# Altium PCB MCD V1.00 R.00.PcbDoc (part 2 of 3)
Units mm, origin at the board's own origin, x right, y up, seen from the top; angles counter-clockwise.
Board outline 257.5 x 162.5 mm, 2 copper layers (Top Layer, Bottom Layer); 260 components, 165 nets, 831 pads, 233 vias.
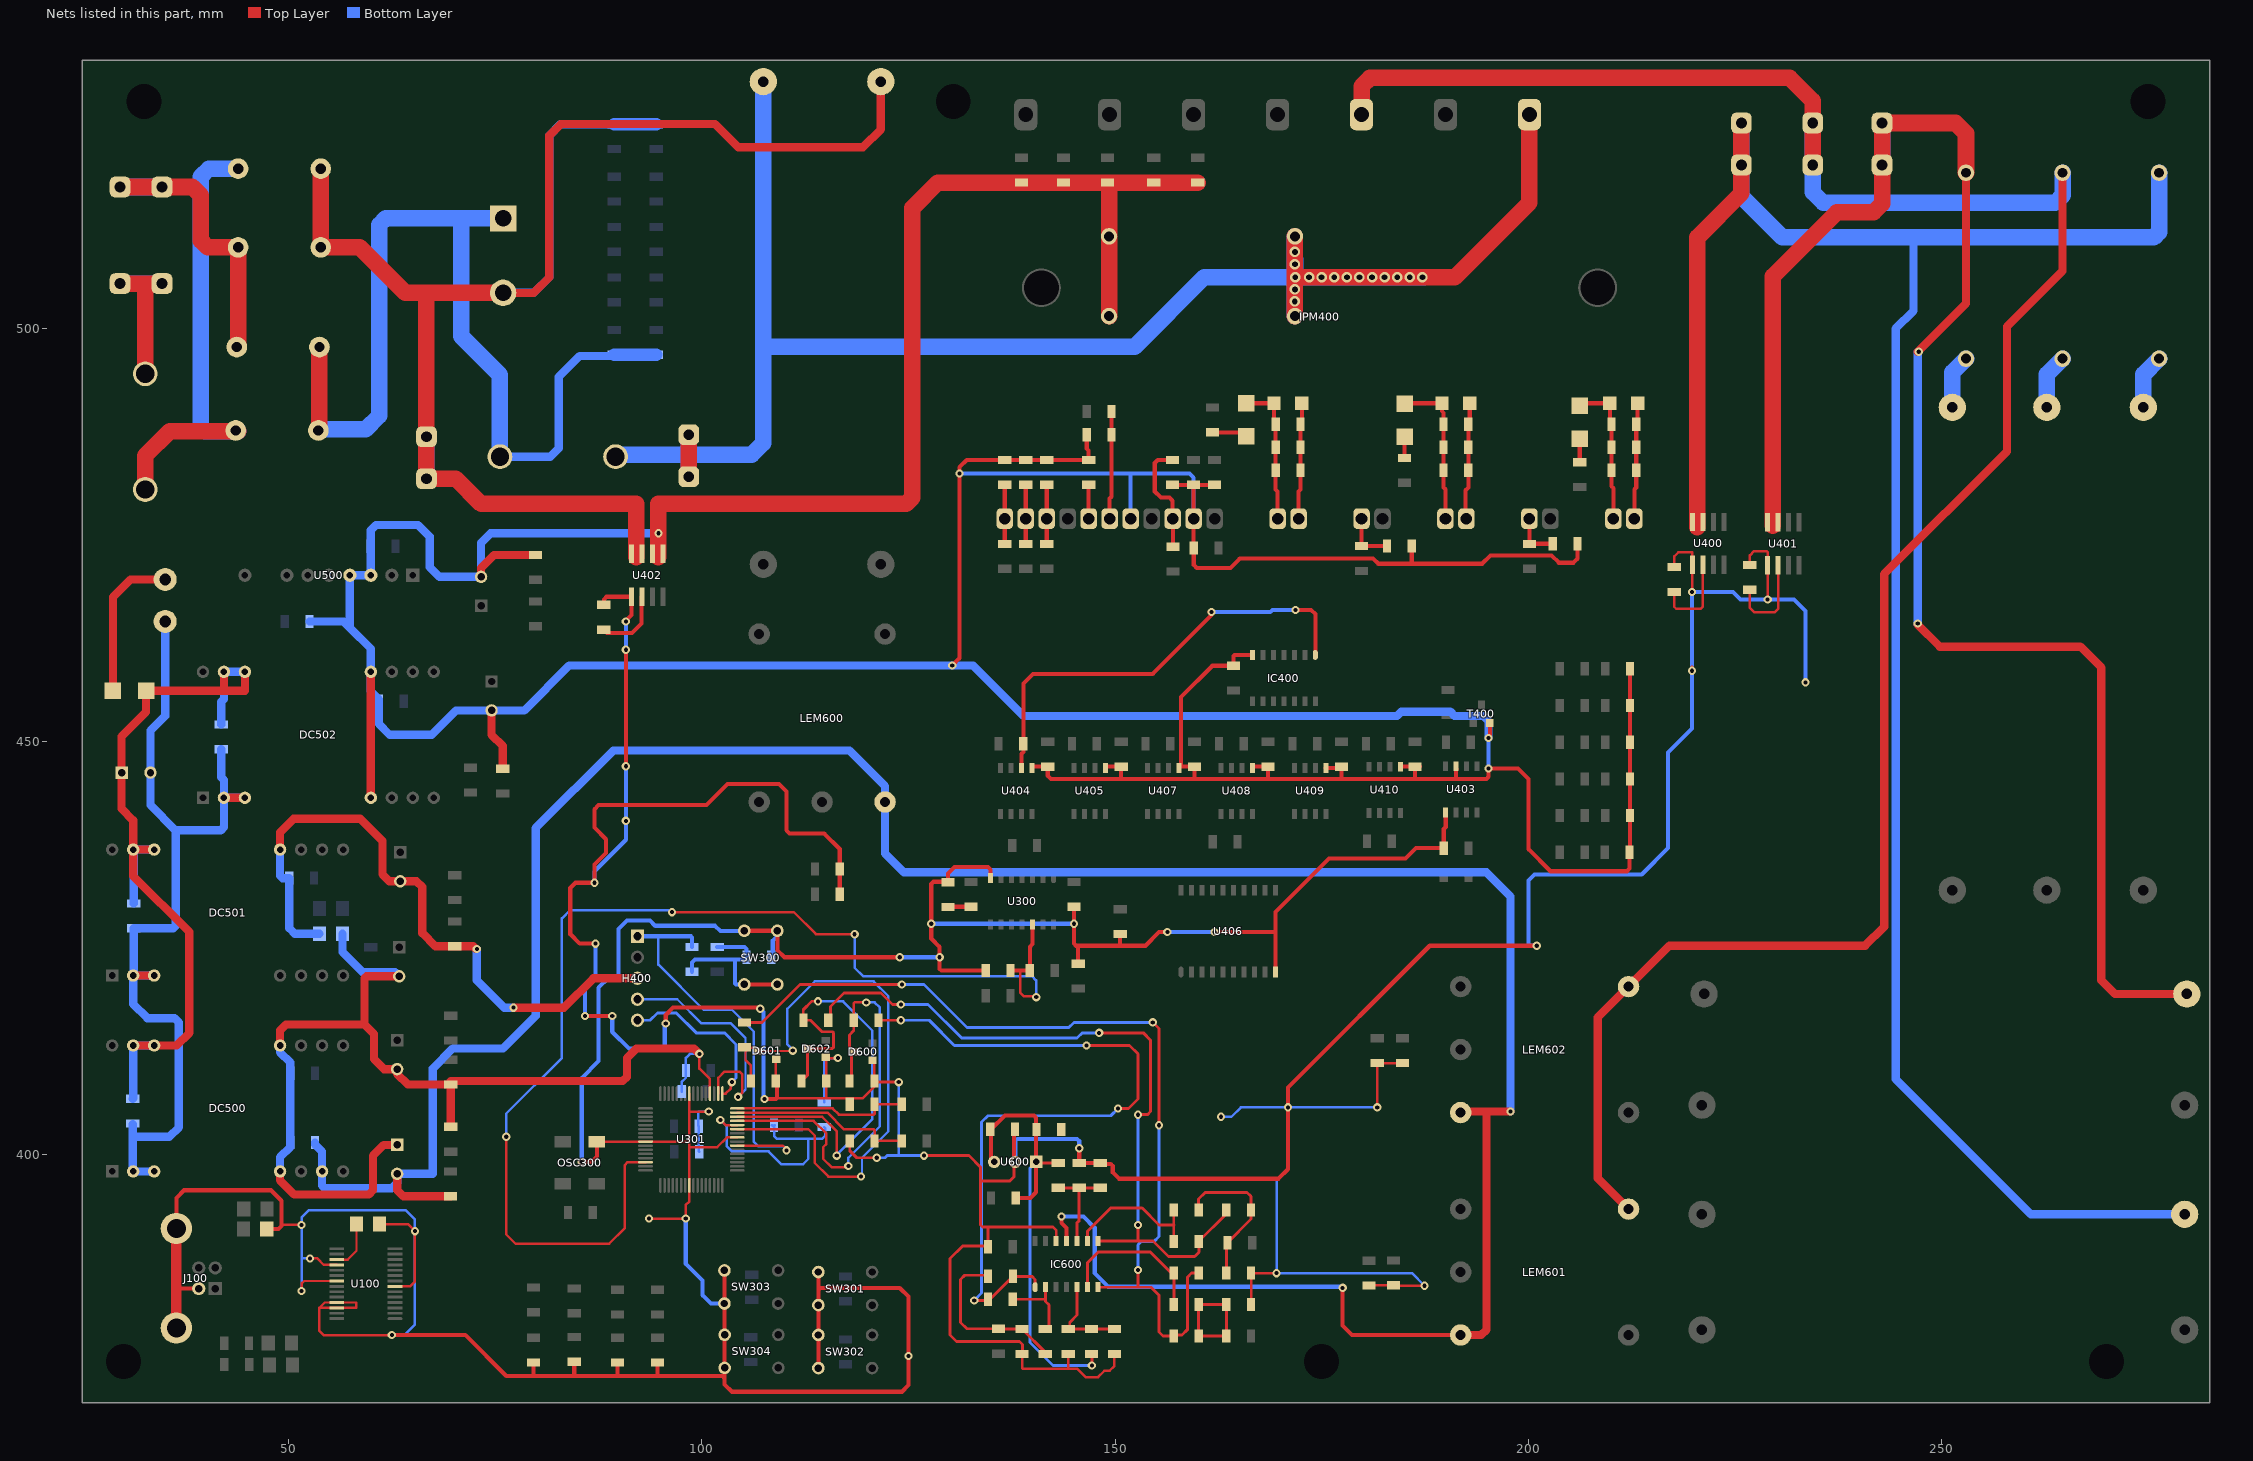
[diagram p2: the nets of this part, all layers, seen from the top]

## Via types
v1: diameter 1, hole 0.5, Top Layer to Bottom Layer, 192 vias
v2: diameter 1.2, hole 0.7, Top Layer to Bottom Layer, 26 vias
v3: diameter 1.27, hole 0.711, Top Layer to Bottom Layer, 15 vias

## Nets (pads, with @x,y where several pads share a name; then routed paths per layer and width w, separated by ;. In a path a pad name is that pad's centre, name@x,y a point inside that pad or via, vN(x,y) a via of type N, cw(c..) or ccw(c..) an arc to the next point about the centre after c; other vN are vias at no path point) (continued)
-15V_ANA: C504.2 C505.1 DC500.11 IC600.11 LEM600.5 LEM601.5 LEM602.5 R501.2 | length 339
  Top Layer w0.5: v1(143.51,392.557) 143.51,391.795 144.145,391.16 IC600.11@144.145,389.599 ; v1(177.546,383.921) 177.546,379.349 178.684,378.211 LEM601.5@191.257,378.211
  Top Layer w1: C504.2@63.124,397.718 63.124,395.775 63.905,394.994 R501.2@69.596,394.994 ; LEM601.5@191.257,378.211 194.315,378.211 194.945,378.841 194.945,405.257 ; LEM602.5@191.829,405.135 191.951,405.257 194.945,405.257 ; v1(197.866,405.257) 194.945,405.257
  Bottom Layer w0.5: v1(143.51,392.557) 146.177,392.557 147.542,391.192 147.542,385.731 149.225,384.048 177.419,384.048 v1(177.546,383.921)
  Bottom Layer w1: C505.1@53.194,401.5 53.194,401.27 54.039,400.425 DC500.11@54.039,398.01 54.039,396.295 54.348,395.986 62.484,395.986 63.124,396.626 C504.2@63.124,397.718 67.437,397.718 67.437,410.464 69.85,412.877 75.946,412.877 79.883,416.814 79.883,439.547 89.281,448.945 117.856,448.945 122.174,444.627 LEM600.5@122.174,442.722 122.174,436.499 124.46,434.213 194.945,434.213 197.866,431.292 v1(197.866,405.257)
GND_ANA: C304.1 C305.1 C400.1 C401.1 C412.1 C413.1 C420.1 C421.1 C500.2 C501.1 C504.1 C505.2 C506.2 C507.1 C601.1 C602.1 C603.1 C605.1 C606.1 C607.1 C609.1 C610.1 C611.1 C612.1 D600.1 D601.1 D602.1 DC500.9 DC500.16 IC600.12 L501.2 LED500.K LED501.A R607.2 R608.2 R615.2 R617.1 R624.2 R626.1 R627.2 R628.2 R629.2 U301.20 U400.5 U401.5 U402.5 U600.2 | length 701.3
  Top Layer w0.3: v1(99.695,412.242) 99.695,410.464 100.984,409.175 U301.20@100.984,407.428 ; C605.1@108.942,408.94 108.942,411.494 D601.1@109.017,411.569 ; 109.156,406.844 117.206,406.844 119.444,406.844 120.88,408.281 C601.1@120.88,408.94 120.88,411.25 D600.1@120.65,411.48 ; D602.1@114.986,411.823 115.075,411.734 v1(116.459,411.734) ; 115.062,406.908 C609.1@115.062,408.94 D602.1@115.062,411.747 ; C603.1@138.759,375.93 138.759,374.194 138.811,374.142 144.399,374.142 ; IC600.12@142.875,389.599 142.875,390.906 ; C607.1@144.347,375.93 144.347,374.194 144.399,374.142 ; R617.1@149.935,375.93 149.935,374.471 149.352,373.888 148.717,373.888 147.955,373.126 146.431,373.126 145.415,374.142 144.399,374.142 ; C606.1@166.469,381.902 C610.1@166.469,385.712 169.532,385.712 v1(169.545,385.699) ; R628.2@180.721,384.199 180.75,384.228 R615.2@183.701,384.228 183.754,384.175 v1(187.452,384.175) ; v1(181.737,405.765) R629.2@181.737,411.123 183.261,411.123 R624.2@184.785,411.123 ; C400.1@217.678,471.146 217.678,472.44 218.186,472.948 219.837,472.948 219.882,472.903 U400.5@219.882,471.421 219.882,468.167 v1(219.837,468.122) ; C412.1@226.822,471.4 226.822,472.567 227.33,473.075 228.854,473.075 228.981,472.948 U401.5@228.981,471.364 v1(228.981,467.233)
  Top Layer w0.35: C413.1@117.904,401.701 117.904,400.51 118.745,399.669 v1(121.158,399.669) ; C601.1@120.88,408.94 121.007,408.813 v1(123.825,408.813) ; v1(126.873,399.923) 132.334,399.923 133.731,398.526 133.731,397.002 ; 133.731,397.383 133.731,397.002 ; 135.001,391.287 134.747,391.287 ; U600.2@137.92,399.161 137.795,399.036 137.795,397.383 137.287,396.875 133.858,396.875 133.731,397.002 ; C603.1@138.759,375.93 138.811,375.982 138.811,377.063 138.43,377.444 130.81,377.444 130.048,378.206 130.048,387.477 131.572,389.001 134.526,389.001 R608.2@134.64,388.887 134.64,391.18 134.747,391.287 ; 142.875,390.906 142.494,391.287 134.747,391.287 ; 133.731,397.002 133.731,391.541 133.985,391.287 134.747,391.287
  Top Layer w0.5: v1(85.852,416.814) v1(89.154,416.814) ; v1(87.122,425.577) 85.217,425.577 84.074,426.72 84.074,432.308 84.709,432.943 v1(86.995,432.943) 86.995,435.166 88.392,436.562 88.392,438.214 86.995,439.611 86.995,441.833 87.503,442.341 100.584,442.341 103.124,444.881 109.347,444.881 110.236,443.992 110.236,439.293 110.617,438.912 114.808,438.912 116.689,437.031 R607.2@116.689,434.594 R627.2@116.689,431.546 ; C420.1@88.138,466.574 88.138,467.233 88.464,467.559 U402.5@91.472,467.559 91.472,465.36 90.805,464.693 v1(90.805,464.566) ; v1(90.805,447.04) v1(90.805,461.137) ; v1(95.631,415.925) 95.631,416.941 96.52,417.83 106.934,417.83 v1(107.061,417.703) ; v1(107.569,406.781) 108.966,406.781 109.093,406.908 109.093,408.789 C605.1@108.942,408.94 ; U600.2@137.794,399.287 C602.1@137.794,403.111 ; v1(145.669,400.812) 145.665,400.808 C611.1@145.665,399.023 R626.1@148.205,399.023 148.321,398.907 149.479,398.907 149.733,398.653 149.733,397.891 150.495,397.129 169.799,397.129 170.942,398.272 v1(170.942,405.765) 170.942,408.178 188.087,425.323 v1(201.041,425.323) ; v1(219.837,458.597) v1@219.837,458.978
  Top Layer w1: DC500.9@48.959,398.01 48.959,396.93 50.665,395.224 59.69,395.224 60.198,395.732 60.198,399.923 61.493,401.218 C504.1@63.124,401.218 ; DC500.16@48.959,413.25 48.959,415.092 49.665,415.798 59.182,415.798 ; C506.2@63.378,421.622 59.407,421.622 59.182,421.397 59.182,415.798 ; LED501.A@69.617,403.405 69.617,408.94 90.424,408.94 90.932,409.448 90.932,411.734 92.075,412.877 99.06,412.877 v1(99.695,412.242) ; LED500.K@69.617,408.533 64.415,408.533 63.124,409.824 C500.2@63.124,410.39 61.542,410.39 60.325,411.607 60.325,414.655 59.182,415.798
  Bottom Layer w0.3: C305.1@97.56,407.67 97.56,408.837 98.068,409.345 C304.1@98.068,410.21 98.068,411.758 98.552,412.242 v1(99.695,412.242) ; C421.1@114.808,406.376 114.808,411.353 115.189,411.734 v1(116.459,411.734) ; v1(162.814,404.622) 164.084,404.622 165.227,405.765 v1(170.942,405.765) ; v1(181.737,405.765) v1(170.942,405.765) ; v1(187.452,384.175) 185.928,385.699 v1(169.545,385.699) 169.545,396.875 170.942,398.272 v1(170.942,405.765)
  Bottom Layer w0.35: v1(121.158,399.669) 122.174,399.669 122.428,399.923 123.825,399.923 ; v1(123.825,408.813) 123.825,399.923 ; v1(126.873,399.923) 123.825,399.923
  Bottom Layer w0.5: v1(85.852,416.814) 85.852,420.37 87.122,421.64 v1(87.122,425.577) ; v1(86.995,432.943) 86.995,434.34 90.805,438.15 v1(90.805,447.04) ; v1(89.154,416.814) 89.154,414.909 91.186,412.877 95.504,412.877 ; v1(90.805,461.137) v1(90.805,464.566) ; v1(95.631,415.925) 95.504,415.798 95.504,412.877 ; v1(99.695,412.242) 99.06,412.877 95.504,412.877 ; v1(107.061,417.703) 107.442,417.322 107.442,406.781 107.569,406.654 v1(107.569,406.781) ; U600.2@137.92,399.161 137.92,401.699 138.176,401.955 145.415,401.955 145.669,401.701 v1(145.669,400.812) ; v1(201.041,425.323) 200.152,425.323 200.025,425.45 200.025,433.197 200.787,433.959 213.741,433.959 216.916,437.134 216.916,448.691 219.837,451.612 v1(219.837,468.122) 224.79,468.122 225.679,467.233 v1(228.981,467.233) 232.156,467.233 233.553,465.836 v1(233.553,457.2)
  Bottom Layer w1: DC500.9@48.959,398.01 48.959,399.733 50.194,400.968 C505.2@50.194,401.5 C501.1@50.194,409.882 50.194,411.197 48.959,412.432 DC500.16@48.959,413.25 ; L501.2@56.523,426.773 56.523,424.553 58.951,422.125 C507.1@59.925,422.125 62.875,422.125 C506.2@63.378,421.622
  other v1: 90.805,440.436
GND_DIG: C100.1 C300.1 C301.1 C302.1 C303.1 C306.1 C419.1 C439.1 C509.2 C511.1 DC501.16 FLT_LED.K H400.3 J100.4 J100.5 J100.6 L501.1 LED502.K OSC300.2 R103.1 R305.2 SW300.1 SW301.1 SW302.1 SW303.1 SW304.1 U100.7 U100.18 U100.21 U100.25 U100.26 U300.7 U301.9 U301.25 U301.41 U301.56 U403.5 U406.10 UL_300.K UL_301.K UL_302.K UL_303.K | length 576.7
  Top Layer w0.3: 49.149,391.414 49.276,391.541 v1(51.562,391.541) v1@51.308,391.795 ; v1(51.562,383.54) 51.562,384.429 51.882,384.749 U100.21@55.819,384.749 ; v1(52.578,387.477) 53.467,387.477 54.229,386.715 55.803,386.715 U100.18@55.819,386.699 ; 58.166,382.143 58.16,382.149 ; C100.1@61.006,391.637 64.42,391.637 v1(65.278,390.779) 65.278,384.683 64.694,384.099 U100.7@62.869,384.099 ; v1(62.484,378.206) 54.229,378.206 53.721,378.714 53.721,381.508 ; OSC300.2@87.684,401.628 U301.41@93.184,401.628 98.431,401.628 98.484,401.574 ; v1(93.599,392.303) v1(98.044,392.303) 98.044,393.954 98.484,394.394 U301.56@98.484,396.328 98.484,400.939 ; U301.25@98.484,407.428 98.484,405.257 ; v1(100.838,405.257) 98.484,405.257 ; U301.9@104.284,402.128 103.043,402.128 101.854,400.939 98.484,400.939 ; 53.721,381.508 54.362,382.149 U100.25@55.819,382.149 58.16,382.149 ; 53.721,381.508 55.81,381.508 U100.26@55.819,381.499 58.157,381.499 58.166,381.508 58.16,381.514 58.16,382.149 ; 98.484,400.939 98.484,401.574 ; 98.484,401.574 98.484,405.257
  Top Layer w0.5: 36.406,383.921 36.493,383.834 J100.4@39.116,383.834 ; J100.6@36.406,391.104 36.406,394.8 37.338,395.732 47.879,395.732 49.149,394.462 49.149,391.414 48.775,391.04 R103.1@47.339,391.04 ; v1(62.484,378.206) 71.374,378.206 76.327,373.253 79.502,373.253 ; UL_303.K@79.638,374.888 79.638,373.389 79.502,373.253 ; 84.559,373.357 UL_302.K@84.559,374.967 ; v1(85.471,399.161) 86.614,399.161 87.294,399.841 OSC300.2@87.294,401.607 ; UL_301.K@89.798,374.888 89.798,373.262 89.789,373.253 ; UL_300.K@94.624,374.888 94.624,373.389 94.488,373.253 ; SW303.1@102.73,386.026 SW303.1@102.73,382.026 102.73,378.272 SW304.1@102.762,378.24 SW304.1@102.762,374.24 102.762,372.98 ; SW300.1@105.135,427.136 SW300.1@109.135,427.136 109.135,424.773 109.982,423.926 v1(123.952,423.926) ; SW302.1@114.097,374.216 SW302.1@114.097,378.216 SW301.1@114.097,381.836 114.097,383.667 ; SW301.1@114.097,385.836 114.097,383.667 ; v1(125,375.666) v1@125,376.047 ; C301.1@134.36,422.313 128.994,422.313 128.778,422.529 v1(128.778,423.926) 128.778,425.196 127.762,426.212 v1(127.762,427.99) 127.762,432.816 128.016,433.07 129.746,433.07 FLT_LED.K@129.794,433.022 129.794,434.086 130.556,434.848 134.62,434.848 134.944,434.524 U300.7@134.944,433.5 ; R305.2@145.034,430.046 v1(145.034,427.99) 145.034,425.577 145.288,425.323 150.622,425.323 ; C306.1@145.542,423.14 145.542,425.323 ; C439.1@150.622,426.744 150.622,425.323 ; v1(156.337,426.974) 155.321,426.974 153.67,425.323 150.622,425.323 ; v1(162.052,426.974) 169.418,426.974 ; U406.10@169.418,422.148 169.418,426.974 ; U403.5@190.028,441.127 190.028,439.71 189.786,439.468 C419.1@189.786,437.134 186.436,437.134 185.166,435.864 175.895,435.864 169.418,429.387 169.418,426.974 ; 79.502,373.253 84.455,373.253 89.789,373.253 ; 89.789,373.253 94.488,373.253 ; 94.488,373.253 102.489,373.253 102.762,372.98 ; 102.762,372.98 102.762,372.218 103.632,371.348 124.206,371.348 125,372.142 v1@125,376.047 ; 114.097,383.667 114.351,383.921 123.952,383.921 125,382.873 v1@125,376.047
  Top Layer w1: DC501.16@48.959,436.96 48.959,439.056 50.593,440.69 58.674,440.69 61.341,438.023 61.341,433.959 62.174,433.126 C509.2@63.5,433.126 65.476,433.126 66.167,432.435 66.167,426.847 67.765,425.249 LED502.K@70.109,425.249 72.337,425.249 72.644,424.942 v1(72.771,424.942) ; v1(77.216,417.83) 83.312,417.83 86.868,421.386 H400.3@92.202,421.386
  Top Layer w1.25: J100.5@36.406,379.064 36.406,383.921 J100.6@36.406,391.104
  Bottom Layer w0.3: v1(51.562,383.54) 51.562,387.604 ; v1(52.578,387.477) 51.689,387.477 51.562,387.604 ; v1(62.484,378.206) 64.008,378.206 65.278,379.476 v1(65.278,390.779) 65.278,392.176 64.135,393.319 52.451,393.319 51.562,392.43 v1(51.562,391.541) 51.562,387.604 ; C303.1@99.671,400.399 99.625,400.445 C302.1@99.625,403.485 99.568,403.542 99.568,405.257 v1(100.838,405.257)
  Bottom Layer w0.5: v1(85.471,399.161) 85.471,409.321 87.503,411.353 87.503,420.243 88.646,421.386 89.916,421.386 ; H400.3@92.202,421.386 89.916,421.386 ; v1(98.044,392.303) 98.044,386.842 100.076,384.81 100.076,383.032 101.092,382.016 101.102,382.026 SW303.1@102.73,382.026 ; SW300.1@105.135,427.136 105.1,427.101 102.235,427.101 101.6,427.736 94.361,427.736 93.726,428.371 90.932,428.371 89.916,427.355 89.916,421.386 ; C300.1@108.413,423.938 108.585,424.11 108.585,425.958 109.135,426.508 SW300.1@109.135,427.136 ; v1(123.952,423.926) v1(128.778,423.926) ; v1(127.762,427.99) v1(145.034,427.99) ; v1(156.337,426.974) v1(162.052,426.974)
  Bottom Layer w1: DC501.16@48.959,436.96 48.959,433.805 49.26,433.504 C511.1@50.067,433.504 50.067,427.453 50.747,426.773 L501.1@53.723,426.773 ; v1(72.771,424.942) 72.771,421.132 76.073,417.83 v1(77.216,417.83)
GND_DRV: C408.1 C414.1 C415.1 C416.1 C417.1 C418.1 C422.1 C423.1 C424.1 C425.1 C426.1 C427.1 C428.1 C429.1 C430.1 C431.1 C432.1 C433.1 C434.1 C438.1 C513.2 C515.1 C516.1 C517.2 C518.1 DC502.9 DC502.16 IC400.7 IPM400.12 IPM400.15 LED503.K LED504.K PWM_UN.K PWM_UP.K PWM_VN.K PWM_VP.K PWM_WN.K PWM_WP.K R406.1 R407.1 R408.1 R409.1 R410.1 T400.2 U402.1 U402.2 U403.3 U404.5 U405.5 U407.5 U408.5 U409.5 U410.5 U500.3 U500.4 | length 679.6
  Top Layer w0.5: v1(130.302,459.232) 131.191,460.121 131.191,483.235 132.056,484.1 C433.1@136.652,484.1 ; C433.1@136.628,484.124 C433.1@136.652,484.1 ; U404.5@139.95,446.853 140.095,446.998 C422.1@141.855,446.998 141.855,445.901 142.24,445.516 150.749,445.516 150.745,445.52 ; C415.1@146.582,487.172 146.582,485.497 146.812,485.267 C414.1@146.812,484.1 C425.1@141.732,484.1 C429.1@139.192,484.1 C433.1@136.652,484.1 ; U405.5@148.84,446.853 148.985,446.998 C424.1@150.745,446.998 150.745,445.52 ; C431.1@156.972,481.1 C418.1@159.512,481.1 ; C416.1@162.052,481.1 C418.1@159.512,481.1 ; U408.5@166.62,446.853 166.765,446.998 C428.1@168.525,446.998 168.525,445.523 168.529,445.52 ; IC400.7@166.624,460.514 164.477,460.514 164.338,460.375 C438.1@164.338,459.208 161.774,459.208 157.988,455.422 157.988,447.111 U407.5@157.73,446.853 157.875,446.998 C426.1@159.635,446.998 159.635,445.643 159.512,445.52 ; U409.5@175.51,446.853 177.27,446.853 C430.1@177.415,446.998 177.415,445.523 177.419,445.52 ; U410.5@184.527,446.98 184.545,446.998 C432.1@186.305,446.998 ; 185.904,471.829 C427.1@185.904,473.71 ; C432.1@186.902,446.998 C432.1@186.305,446.998 ; U403.3@191.298,446.727 191.262,446.691 191.262,445.643 191.139,445.52 ; v1(195.199,450.469) 195.367,450.637 T400.2@195.367,452.269 ; C423.1@205.97,473.964 205.97,472.162 205.486,471.678 203.708,471.678 202.819,472.567 195.453,472.567 194.437,471.551 181.864,471.551 181.229,472.186 165.1,472.186 163.957,471.043 159.893,471.043 159.536,471.4 C417.1@159.536,473.456 159.512,473.48 IPM400.12@159.512,477.012 C418.1@159.512,481.1 ; PWM_UP.K@212.32,458.851 PWM_UN.K@212.32,454.406 PWM_VP.K@212.32,449.961 PWM_VN.K@212.32,445.516 PWM_WP.K@212.32,441.071 212.32,436.674 PWM_WN.K@212.272,436.626 212.272,434.649 211.963,434.34 202.692,434.34 200.025,437.007 200.025,445.516 198.755,446.786 v1(195.199,446.786) 195.199,445.77 194.949,445.52 191.139,445.52 ; 150.745,445.52 159.512,445.52 ; 159.512,445.52 168.529,445.52 ; 168.529,445.52 177.419,445.52 ; 177.419,445.52 186.309,445.52 ; C432.1@186.305,446.998 186.305,445.523 186.309,445.52 ; 186.309,445.52 191.139,445.52
  Top Layer w1: DC502.9@59.944,443.23 59.944,451.739 DC502.16@59.944,458.47 ; C517.2@73.279,469.971 73.279,471.043 74.851,472.615 LED504.K@79.883,472.615 ; C513.2@74.549,453.799 74.549,450.85 75.914,449.485 LED503.K@75.914,446.738
  Top Layer w2: 94.742,472.313 94.742,478.79 124.714,478.79 125.476,479.552 125.476,514.604 128.548,517.676 R410.1@138.684,517.676 R406.1@143.764,517.676 R407.1@149.098,517.676 ; C408.1@149.278,501.523 C434.1@149.278,511.175 149.278,517.496 R407.1@149.098,517.676 ; R409.1@160.02,517.676 R408.1@154.686,517.676 R407.1@149.098,517.676
  Bottom Layer w0.5: v1(131.191,482.473) 151.892,482.473 ; IPM400.15@151.892,477.012 151.892,482.473 ; IPM400.12@159.512,477.012 159.512,481.965 159.004,482.473 151.892,482.473 ; v1(195.199,446.786) v1(195.199,450.469)
  Bottom Layer w1: C516.1@52.511,464.551 56.657,464.551 57.404,463.804 ; v1(94.742,475.234) 74.422,475.234 73.279,474.091 C517.2@73.279,469.971 68.255,469.971 67.056,471.17 67.056,474.853 65.659,476.25 60.579,476.25 59.925,475.596 C518.1@59.925,473.656 59.944,473.637 U500.3@59.944,470.154 U500.4@57.404,470.154 57.404,463.804 ; v1(195.199,450.469) 195.199,452.501 194.564,453.136 191.087,453.136 190.579,453.644 184.642,453.644 184.134,453.136 180.657,453.136 152.844,453.136 138.938,453.136 132.842,459.232 83.947,459.232 78.514,453.799 C513.2@74.549,453.799 70.259,453.799 67.31,450.85 62.23,450.85 60.921,452.159 C515.1@60.921,454.906 60.921,455.136 59.944,456.113 DC502.16@59.944,458.47 59.944,461.264 57.404,463.804
NetC100_2: C100.2 U100.17 | length 5.8
  Top Layer w0.3: U100.17@56.05,387.35 57.15,387.35 58.206,388.406 C100.2@58.206,391.637
NetC300_2: C300.2 R300.2 R302.1 SW300.2 | length 20.7
  Top Layer w0.5: SW300.2@105.135,420.636 SW300.2@109.135,420.636
  Bottom Layer w0.5: R302.1@98.806,422.172 98.806,423.291 99.187,423.672 104.013,423.672 ; R300.2@101.854,425.172 105.18,425.172 105.413,424.939 C300.2@105.413,423.938 105.147,423.672 104.013,423.672 ; SW300.2@105.135,420.636 104.128,420.636 104.013,420.751 104.013,423.672
NetC301_2: C301.2 R304.2 U300.12 U301.46 | length 145.6
  Top Layer w0.3: v1(76.327,402.209) 76.327,390.398 77.47,389.255 88.773,389.255 90.678,391.16 90.678,398.78 91.026,399.128 U301.46@93.184,399.128 ; v1(96.393,429.387) 111.125,429.387 113.792,426.72 v1(118.491,426.72) ; 138.557,422.313 138.557,419.608 138.938,419.227 140.081,419.227 140.208,419.1 v1(140.462,419.1)
  Top Layer w0.5: C301.2@137.36,422.313 138.557,422.313 R304.2@139.694,422.313 R304.2@139.7,422.319 ; R304.2@139.7,422.275 139.7,425.196 140.024,425.52 U300.12@140.024,427.9
  Bottom Layer w0.3: v1(76.327,402.209) 76.327,405.003 83.058,411.734 83.058,428.625 84.074,429.641 95.885,429.641 96.139,429.387 v1(96.393,429.387) ; v1(118.491,426.72) 118.491,422.656 119.507,421.64 139.954,421.64 140.462,421.132 v1(140.462,419.1)
NetC400_2: C400.2 U400.6 | length 10.5
  Top Layer w0.3: C400.2@217.678,468.146 217.678,466.344 217.932,466.09 220.853,466.09 221.152,466.389 U400.6@221.152,471.421
NetC401_2: C401.2 R400.2 U301.16 | length 21.6
  Top Layer w0.3: U301.16@104.284,405.628 115.834,405.628 116.586,404.876 120.777,404.876 120.904,405.003 C401.2@120.904,406.146 ; C401.2@120.777,406.146 R400.2@124.206,406.146
NetC402_1: C402.1 C403.1 C404.1 D400.A IPM400.1 | length 14.1
  Top Layer w0.5: IPM400.1@212.852,477.012 212.852,480.568 213.082,480.798 C404.1@213.082,482.854 C403.1@213.082,485.648 C402.1@213.082,488.442 213.252,488.612 D400.A@213.252,490.982
NetC402_2: C402.2 C403.2 C404.2 D400.K D403.K IPM400.2 | length 17.9
  Top Layer w0.5: D403.K@206.248,490.664 206.566,490.982 D400.K@209.882,490.982 209.882,488.642 C402.2@210.082,488.442 C403.2@210.082,485.648 C404.2@210.082,482.854 210.082,480.925 210.312,480.695 IPM400.2@210.312,477.012
NetC405_1: C405.1 C406.1 C407.1 D401.A IPM400.5 | length 14.2
  Top Layer w0.5: IPM400.5@192.532,477.012 192.405,477.139 192.405,480.441 192.762,480.798 C407.1@192.762,482.854 C406.1@192.762,485.648 C405.1@192.762,488.442 192.932,488.612 D401.A@192.932,490.982
NetC405_2: C405.2 C406.2 C407.2 D401.K D404.K IPM400.6 | length 18.7
  Top Layer w0.5: D404.K@185.039,490.918 185.103,490.982 D401.K@189.562,490.982 189.562,490.015 189.762,489.815 C405.2@189.762,488.442 C406.2@189.762,485.648 C407.2@189.762,482.854 189.762,480.798 189.992,480.568 IPM400.6@189.992,477.012
NetC408_2: C408.2 C434.2 F701.2 IPM400.22 P702.1 P702.2 R606.2 | length 242
  Top Layer w2: P702.1@98.425,482.092 P702.2@98.425,487.172 ; C408.2@171.778,501.523 C434.2@171.778,511.175 ; v3@171.831,506.021 172.032,506.222 191.135,506.222 200.152,515.239 IPM400.22@200.152,525.907
  Bottom Layer w2: F701.2@89.565,484.505 89.819,484.759 98.425,484.759 ; P702.1@98.425,482.092 98.425,484.759 ; P702.2@98.425,487.172 98.425,484.759 ; 107.437,521.462 107.437,509.905 107.437,486.151 106.045,484.759 98.425,484.759 ; R606.2@107.437,529.898 107.437,497.84 152.4,497.84 160.782,506.222 171.704,506.222 171.806,506.12 v3(171.806,506.222) ; C408.2@171.778,501.523 171.778,506.222 v3@187.452,506.222 ; C434.2@171.778,511.175 v3@171.78,506.095
  other v3: 171.755,503.301 171.78,504.749 173.482,506.222 175.006,506.222 176.53,506.222 178.054,506.222 179.578,506.222 181.102,506.222 182.626,506.222 184.15,506.222 185.674,506.222 187.198,506.222 171.78,507.797 171.78,509.295
NetC409_1: C409.1 C410.1 C411.1 D402.A IPM400.9 | length 14.1
  Top Layer w0.5: IPM400.9@172.212,477.012 172.212,480.314 172.442,480.544 C411.1@172.442,482.854 C410.1@172.442,485.648 C409.1@172.442,488.442 172.612,488.612 D402.A@172.612,490.982
NetC409_2: C409.2 C410.2 C411.2 D402.K D405.K IPM400.10 | length 17.5
  Top Layer w0.5: D405.K@165.862,490.982 D402.K@169.242,490.982 169.242,488.642 C409.2@169.442,488.442 C410.2@169.442,485.648 C411.2@169.442,482.854 169.442,480.544 169.672,480.314 IPM400.10@169.672,477.012
NetC412_2: C412.2 U401.6 | length 11.3
  Top Layer w0.3: C412.2@226.822,468.4 226.822,466.217 227.33,465.709 229.87,465.709 230.251,466.09 U401.6@230.251,471.364
NetC413_2: C413.2 R401.2 U301.15 | length 22.1
  Top Layer w0.3: U301.15@104.284,405.128 115.191,405.128 117.221,403.098 120.777,403.098 120.904,402.971 C413.2@120.904,401.701 R401.2@124.206,401.701
NetC414_2: C414.2 IPM400.17 | length 4.1
  Top Layer w0.5: IPM400.17@146.812,477.012 C414.2@146.812,481.1
NetC415_2: C415.2 IPM400.16 R403.1 | length 13
  Top Layer w0.5: IPM400.16@149.352,477.012 149.352,479.425 149.582,479.655 C415.2@149.582,487.172 R403.1@149.582,489.966
NetC420_2: C420.2 U402.6 | length 8.5
  Top Layer w0.5: C420.2@88.138,463.574 88.543,463.169 91.567,463.169 92.71,464.312 92.71,467.527 U402.6@92.742,467.559
NetC421_2: C421.2 R414.2 U301.12 | length 28.7
  Top Layer w0.3: v1(102.235,404.241) 102.87,403.606 102.892,403.628 U301.12@104.284,403.628
  Bottom Layer w0.3: v1(102.235,404.241) 102.997,403.479 102.997,401.066 103.632,400.431 108.077,400.431 109.601,398.907 112.268,398.907 112.903,399.542 112.903,401.828 112.776,401.955 ; R414.2@108.482,403.606 R414.2@108.736,403.352 ; R414.2@108.839,403.606 R414.2@108.736,403.606 108.736,402.312 109.093,401.955 112.776,401.955 ; C421.2@114.808,403.376 114.935,403.249 114.935,402.336 114.554,401.955 112.776,401.955
NetC423_2: C423.2 IPM400.4 R417.2 | length 5.9
  Top Layer w0.5: IPM400.4@200.152,477.012 R417.2@200.152,473.94 200.176,473.964 C423.2@202.97,473.964
NetC425_2: C425.2 IPM400.19 R420.2 | length 7.2
  Top Layer w0.5: R420.2@141.732,473.94 IPM400.19@141.732,477.012 C425.2@141.732,481.1
NetC427_2: C427.2 IPM400.8 R424.2 | length 6.4
  Top Layer w0.5: IPM400.8@179.832,477.012 R424.2@179.832,473.686 182.88,473.686 C427.2@182.904,473.71
NetC429_2: C429.2 IPM400.20 R427.2 | length 7.2
  Top Layer w0.5: R427.2@139.192,473.94 IPM400.20@139.192,477.012 C429.2@139.192,481.1
NetC431_2: C431.2 IPM400.13 R431.2 | length 14
  Top Layer w0.5: C431.2@156.972,484.1 155.17,484.1 154.813,483.743 154.813,480.314 155.575,479.552 156.591,479.552 156.972,479.171 IPM400.13@156.972,477.012 157.032,476.952 R431.2@157.032,473.603
NetC433_2: C433.2 IPM400.21 R434.2 | length 7.2
  Top Layer w0.5: R434.2@136.652,473.94 IPM400.21@136.652,477.012 C433.2@136.652,481.1
NetC435_1: C435.1 R436.1 | length 6.6
  Bottom Layer w2: R436.1@251.333,490.474 251.333,494.718 C435.1@252.984,496.369
NetC435_2: C435.2 P402.1 P402.2 R619.2 U401.3 U401.4 | length 207.7
  Top Layer w1: v1@247.142,464.185 249.809,461.518 266.827,461.518 269.367,458.978 269.367,421.132 271.013,419.486 R619.2@279.708,419.486 ; v1@247.142,497.205 252.984,503.047 C435.2@252.984,518.869
  Top Layer w2: 229.616,476.123 229.616,506.349 237.363,514.096 241.808,514.096 242.824,515.112 P402.1@242.824,519.811 P402.2@242.824,524.891 251.714,524.891 252.984,523.621 C435.2@252.984,518.869
  Bottom Layer w1: v1@247.142,464.185 v1(247.142,464.312) v1@247.142,497.205
  Bottom Layer w2: P402.1@242.824,519.811 P402.2@242.824,524.891
  other v1: 247.269,497.205
NetC436_1: C436.1 R437.1 | length 6.7
  Bottom Layer w2: R437.1@262.763,490.474 262.763,494.464 C436.1@264.668,496.369
NetC436_2: C436.2 IPM400.24 LEM601.2 LEM602.2 P401.1 P401.2 | length 273.8
  Top Layer w1: LEM601.2@212.149,393.451 208.407,397.193 208.407,416.633 LEM602.2@212.149,420.375 217.097,425.323 240.792,425.323 243.078,427.609 243.078,470.281 257.937,485.14 257.937,500.253 264.668,506.984 C436.2@264.668,518.869
  Top Layer w2: IPM400.24@179.832,525.907 179.832,529.336 180.848,530.352 231.648,530.352 234.442,527.558 P401.1@234.442,524.891 P401.2@234.442,519.811
  Bottom Layer w2: P401.1@234.442,524.891 P401.2@234.442,519.811 234.442,516.509 235.712,515.239 263.779,515.239 264.668,516.128 C436.2@264.668,518.869
NetC437_1: C437.1 R438.1 | length 6.7
  Bottom Layer w2: R438.1@274.447,490.474 274.447,494.464 C437.1@276.352,496.369
NetC437_2: C437.2 P400.1 P400.2 R610.2 U400.3 U400.4 | length 264.6
  Top Layer w2: 220.472,475.996 220.472,511.048 225.806,516.382 P400.2@225.806,519.811 P400.1@225.806,524.891
  Bottom Layer w1: 246.634,511.048 246.634,502.158 244.475,499.999 244.475,409.194 260.853,392.816 R610.2@279.454,392.816
  Bottom Layer w2: P400.1@225.806,524.891 P400.2@225.806,519.811 225.806,516.001 230.759,511.048 246.634,511.048 275.717,511.048 276.352,511.683 C437.2@276.352,518.869
NetC503_1: C503.1 C508.2 C510.1 C519.1 DC500.2 DC500.3 DC501.2 DC501.3 DC502.2 DC502.3 P500.2 | length 112.1
  Top Layer w1: DC501.2@31.179,421.72 DC501.3@33.719,421.72 ; DC502.2@42.164,443.23 DC502.3@44.704,443.23
  Bottom Layer w1: C503.1@31.12,403.733 31.12,398.069 DC500.2@31.179,398.01 DC500.3@33.719,398.01 ; 31.369,402.209 35.56,402.209 36.703,403.352 36.703,416.044 36.187,416.56 32.893,416.56 31.179,418.274 DC501.2@31.179,421.72 ; DC501.3@33.719,421.72 DC501.2@31.179,421.72 ; P500.2@35.052,464.566 35.052,453.136 33.274,451.358 C508.2@33.274,446.278 33.274,442.341 36.322,439.293 ; C519.1@41.847,449.088 41.847,445.706 42.164,445.389 DC502.2@42.164,443.23 ; 42.164,439.674 41.783,439.293 36.322,439.293 ; 42.164,439.754 DC502.2@42.164,443.23 ; DC502.3@44.704,443.23 DC502.2@42.164,443.23 ; DC501.2@31.179,421.72 31.247,421.788 C510.1@31.247,427.432 36.018,427.432 36.322,427.736 36.322,439.293
NetC503_2: C503.2 C508.1 C510.2 C519.2 D500.K DC500.22 DC500.23 DC501.22 DC501.23 DC502.22 DC502.23 | length 99.7
  Top Layer w1: DC500.23@31.179,413.25 36.441,413.25 37.973,414.782 37.973,426.974 31.179,433.768 DC501.23@31.179,436.96 ; DC501.22@33.719,436.96 DC501.23@31.179,436.96 ; DC502.23@42.164,458.47 42.164,456.184 ; DC502.22@44.704,458.47 44.704,456.184 42.164,456.184 ; DC501.23@31.179,436.96 31.179,440.499 29.774,441.904 C508.1@29.774,446.278 29.774,450.652 32.734,453.612 D500.K@32.734,456.184 42.164,456.184
  Bottom Layer w1: C503.2@31.12,406.81 31.179,406.869 DC500.23@31.179,413.25 DC500.22@33.719,413.25 ; C510.2@31.247,430.432 31.247,436.892 DC501.23@31.179,436.96 DC501.22@33.719,436.96 ; C519.2@41.847,452.088 41.847,454.851 42.164,455.168 DC502.23@42.164,458.47 DC502.22@44.704,458.47
NetC600_1: C600.1 IC600.2 R604.2 | length 9.1
  Top Layer w0.35: C600.1@137.64,382.537 141.592,382.537 141.605,382.524 ; IC600.2@141.605,383.999 141.605,382.524 ; R604.2@142.016,379.071 142.016,381.868 141.605,382.279 141.605,382.524
NetC600_2: C600.2 IC600.1 R600.2 R605.1 | length 90.2
  Top Layer w0.35: R605.1@121.388,416.306 v1(124.079,416.306) ; v1(132.969,382.397) 134.5,382.397 C600.2@134.64,382.537 134.861,382.537 R600.2@137.642,385.318 139.954,385.318 140.335,384.937 IC600.1@140.335,383.999 ; v1(146.558,413.258) 151.765,413.258 152.781,412.242 152.781,406.781 151.638,405.638 v1(150.368,405.638)
  Bottom Layer w0.35: v1(124.079,416.306) 127.508,416.306 130.556,413.258 v1(146.558,413.258) ; v1(132.969,382.397) 133.858,383.286 133.858,403.987 134.62,404.749 149.479,404.749 v1(150.368,405.638)
NetC601_2: C601.2 D600.3 R605.2 U301.13 | length 52.3
  Top Layer w0.3: U301.13@104.284,404.128 113.524,404.128 115.062,402.59 115.062,401.32 114.681,400.939 114.681,399.542 115.697,398.526 117.729,398.526 v1(117.729,398.653) ; R605.2@118.388,416.306 118.388,418.362 118.491,418.465 v1(119.888,418.465)
  Top Layer w0.35: C601.2@117.88,408.94 118.11,409.17 118.11,412.826 117.856,413.08 117.856,414.528 118.388,415.06 R605.2@118.388,416.306
  Bottom Layer w0.3: v1(117.729,398.653) 117.729,399.669 121.539,403.479 121.539,417.83 120.904,418.465 v1(119.888,418.465)
NetC602_2: C602.2 C612.2 R602.1 R616.1 R625.1 U600.1 U600.3 | length 57.1
  Top Layer w0.35: U600.1@140.46,399.161 140.598,399.023 R625.1@143.125,399.023 ; R616.1@147.141,375.93 147.193,375.878 v1(147.193,374.523)
  Top Layer w0.5: U600.3@135.38,399.161 134.994,399.547 134.994,403.111 136.667,404.784 140.182,404.784 140.46,404.506 U600.1@140.46,399.161 140.46,395.493 139.755,394.788 R602.1@137.987,394.788
  Bottom Layer w0.35: U600.1@140.46,399.161 139.7,398.401 139.7,377.317 142.494,374.523 v1(147.193,374.523)
NetC603_2: C603.2 R600.1 R603.2 R604.1 | length 20.7
  Top Layer w0.35: R600.1@134.642,385.318 134.515,385.445 131.826,385.445 131.318,384.937 131.318,379.73 132.08,378.968 135.875,378.968 R603.2@135.886,378.957 138.732,378.957 C603.2@138.759,378.93 141.553,376.136 R604.1@141.553,375.93
NetC604_1: C604.1 IC600.6 R613.2 | length 18.6
  Top Layer w0.35: IC600.6@146.685,383.999 146.685,386.969 147.955,388.239 154.305,388.239 157.119,385.425 R613.2@157.119,381.902
NetC604_2: C604.2 IC600.7 R609.2 R614.1 | length 112.1
  Top Layer w0.35: R614.1@105.156,416.028 107.291,416.028 111.887,420.624 v1(124.206,420.624) ; IC600.7@147.955,383.999 152.781,383.999 ; v1(152.781,386.08) 152.781,383.999 ; v1(154.559,416.052) 155.321,415.29 v1(155.321,403.606) ; C604.2@160.119,385.712 159.271,385.712 158.75,385.191 158.75,378.841 158.115,378.206 157.233,378.206 R609.2@157.119,378.092 155.816,378.092 155.321,378.587 155.321,383.032 154.354,383.999 152.781,383.999
  Bottom Layer w0.35: v1(124.206,420.624) 126.873,420.624 132.08,415.417 144.399,415.417 145.034,416.052 v1(154.559,416.052) ; v1(152.781,386.08) 152.781,389.128 153.162,389.509 154.686,389.509 155.321,390.144 v1(155.321,403.606)
NetC605_2: C605.2 D601.3 R614.2 U301.11 | length 72
  Top Layer w0.3: U301.11@104.284,403.128 112.873,403.128 113.665,402.336 113.665,399.034 115.316,397.383 v1(119.253,397.383) ; C605.2@105.942,408.94 105.942,410.821 105.283,411.48 105.283,412.496 105.791,413.004 106.388,413.004 D601.3@106.807,412.585 110.706,412.585 110.871,412.75 v1@110.998,412.75
  Bottom Layer w0.3: v1@110.998,412.75 110.363,413.385 110.363,417.703 113.665,421.005 120.777,421.005 122.555,419.227 122.555,402.844 119.38,399.669 119.38,397.51 v1(119.253,397.383)
  other v1: 110.998,412.623
NetC606_2: C606.2 R609.1 R612.2 R613.1 | length 14.3
  Top Layer w0.35: R609.1@160.119,378.092 R613.1@160.119,381.902 C606.2@163.469,381.902 R612.2@163.469,378.092 R609.1@160.119,378.092
NetC607_2: C607.2 IC600.5 R616.2 R617.2 | length 10.7
  Top Layer w0.35: C607.2@144.347,378.93 R616.2@147.141,378.93 ; C607.2@144.522,378.957 144.522,379.743 145.415,380.636 IC600.5@145.415,383.999 ; R616.2@147.062,378.957 R617.2@149.602,378.957
NetC608_1: C608.1 IC600.9 R622.2 | length 17.4
  Top Layer w0.3: C608.1@157.119,389.522 157.119,391.541 R622.2@157.119,393.332
  Top Layer w0.35: IC600.9@146.685,389.599 146.685,390.779 149.479,393.573 153.289,393.573 155.321,391.541 157.119,391.541
NetC608_2: C608.2 IC600.8 R618.2 R623.1 | length 89.3
  Top Layer w0.35: R623.1@115.292,416.306 115.57,416.584 115.57,417.957 117.221,419.608 121.666,419.608 123.063,418.211 v1(124.079,418.211) ; IC600.8@147.955,389.599 152.781,389.599 ; v1(148.082,414.782) 153.416,414.782 154.305,413.893 154.305,405.257 153.924,404.876 v1(152.781,404.876) ; v1(152.781,391.541) 152.781,389.599 ; R618.2@163.469,393.332 163.469,392.872 C608.2@160.119,389.522 160.147,389.494 160.147,388.239 159.639,387.731 156.464,387.731 154.596,389.599 152.781,389.599
  Bottom Layer w0.35: v1(124.079,418.211) 127.381,418.211 131.445,414.147 145.415,414.147 146.05,414.782 v1(148.082,414.782) ; v1(152.781,391.541) v1(152.781,404.876)
NetC609_2: C609.2 D602.3 R623.2 U301.14 | length 57.5
  Top Layer w0.3: U301.14@104.284,404.628 114.548,404.628 116.332,402.844 v1(116.332,399.923) ; 113.284,418.592 v1(114.046,418.592)
  Top Layer w0.35: C609.2@112.062,408.94 112.776,409.654 D602.3@112.776,412.839 112.814,412.877 115.824,412.877 115.951,413.004 115.951,414.782 115.824,414.909 114.554,414.909 113.157,416.306 R623.2@112.292,416.306 ; R623.2@112.268,416.433 112.268,417.576 113.284,418.592
  Bottom Layer w0.3: v1(114.046,418.592) 117.094,418.592 120.65,415.036 120.65,404.368 116.332,400.05 v1(116.332,399.923)
NetC610_2: C610.2 R618.1 R621.2 R622.1 | length 18.8
  Top Layer w0.35: R622.1@160.119,393.332 160.119,394.688 160.909,395.478 165.989,395.478 166.469,394.998 R618.1@166.469,393.332 166.469,392.251 R621.2@163.6,389.382 163.469,389.251 C610.2@163.469,385.712
NetC611_2: C611.2 IC600.10 R625.2 R626.2 | length 11.6
  Top Layer w0.35: R625.2@143.125,396.023 C611.2@145.665,396.023 ; IC600.10@145.415,389.599 145.415,391.795 145.665,392.045 C611.2@145.665,396.023 ; R626.2@148.205,396.023 C611.2@145.665,396.023
NetC700_1: C700.1 D701.K D703.K F701.1 R700.1 R701.1 | length 116.3
  Top Layer w2: D701.K@53.594,487.68 53.719,487.805 D703.K@53.719,497.773
  Bottom Layer w1: F701.1@75.565,484.505 81.661,484.505 82.677,485.521 82.677,494.157 85.217,496.697 89.257,496.697 R701.1@89.408,496.848
  Bottom Layer w1.5: R701.1@89.408,496.848 R700.1@94.488,496.848
  Bottom Layer w2: D701.K@53.594,487.68 53.721,487.807 59.309,487.807 60.96,489.458 60.96,512.572 61.722,513.334 72.644,513.334 C700.1@75.946,513.334 ; 70.866,513.08 70.866,499.11 75.565,494.411 F701.1@75.565,484.505
NetC700_2: C700.2 D700.A D702.A P703.1 P703.2 R601.2 R708.2 R709.2 U402.3 U402.4 | length 208.2
  Top Layer w1: C700.2@75.946,504.334 75.963,504.317 79.629,504.317 81.534,506.222 81.534,523.367 82.931,524.764 101.6,524.764 104.394,521.97 119.507,521.97 121.661,524.124 R601.2@121.661,529.898
  Top Layer w2: D700.A@53.879,519.363 D702.A@53.879,509.838 58.614,509.838 64.118,504.334 66.819,504.334 ; 71.23,504.334 66.819,504.334 ; C700.2@75.946,504.334 66.819,504.334 ; 92.075,472.313 92.075,478.79 73.279,478.79 70.231,481.838 P703.2@66.675,481.838 P703.1@66.675,486.918 66.675,504.19 66.819,504.334
  Bottom Layer w1: C700.2@75.946,504.334 79.646,504.334 81.534,506.222 81.534,523.367 82.907,524.74 R709.2@89.408,524.74
  Bottom Layer w1.5: R709.2@89.408,524.74 R708.2@94.488,524.74
  Bottom Layer w2: P703.2@66.675,481.838 P703.1@66.675,486.918
NetD403_A: D403.A R405.1 | length 2.8
  Top Layer w0.5: R405.1@206.248,483.846 D403.A@206.248,486.664
NetD404_A: D404.A R404.1 | length 2.6
  Top Layer w0.5: R404.1@185.039,484.354 D404.A@185.039,486.918
NetD405_A: D405.A R402.1 | length 4.3
  Top Layer w0.5: R402.1@161.798,487.45 165.394,487.45 D405.A@165.862,486.982
NetD500_A: D500.A P500.1 | length 18.5
  Top Layer w1: D500.A@28.734,456.184 28.734,467.519 30.861,469.646 P500.1@35.052,469.646
NetD700_K: D700.K D701.A F700.2 | length 56.5
  Top Layer w2: F700.2@32.639,480.538 32.639,484.632 35.62,487.613 D701.A@43.879,487.613
  Bottom Layer w2: D701.A@43.879,487.613 39.818,487.613 39.37,488.061 39.37,518.407 40.326,519.363 D700.K@43.879,519.363
NetD702_K: D702.K D703.A P701.1 P701.2 | length 37.7
  Top Layer w2: P701.2@29.591,517.144 P701.1@34.671,517.144 38.354,517.144 39.37,516.128 39.37,510.667 40.199,509.838 D702.K@43.879,509.838 43.879,497.933 D703.A@43.719,497.773
  Bottom Layer w2: P701.2@29.591,517.144 P701.1@34.671,517.144
NetF700_1: F700.1 P700.1 P700.2 | length 21.1
  Top Layer w2: P700.2@29.591,505.46 32.639,505.46 ; F700.1@32.639,494.538 32.639,505.46 ; P700.1@34.671,505.46 32.639,505.46
  Bottom Layer w2: P700.2@29.591,505.46 P700.1@34.671,505.46
NetFLT_LED_A: FLT_LED.A R314.1 | length 2.8
  Top Layer w0.5: FLT_LED.A@129.794,430.022 129.818,430.046 R314.1@132.588,430.046
NetH400_1: H400.1 R302.2 U301.7 | length 51.1
  Top Layer w0.3: U301.7@104.284,401.128 109.793,401.128 110.236,400.685 v1(110.236,400.558)
  Bottom Layer w0.3: 94.742,426.466 94.742,423.037 100.203,417.576 103.632,417.576 106.299,414.909 106.299,401.574 106.807,401.066 109.855,401.066 110.236,400.685 v1(110.236,400.558)
  Bottom Layer w0.5: H400.1@92.202,426.466 95.631,426.466 ; 94.742,426.466 98.679,426.466 98.806,426.339 R302.2@98.806,425.172
NetH400_4: H400.4 U301.18 | length 30.7
  Top Layer w0.3: U301.18@101.984,407.428 101.984,409.324 102.743,410.083 104.557,410.083 104.902,409.738 104.902,407.543 v1(104.394,407.035)
  Bottom Layer w0.3: H400.4@92.202,418.846 97.028,418.846 99.949,415.925 103.505,415.925 105.283,414.147 105.283,407.924 v1(104.394,407.035)
NetH400_5: H400.5 U301.17 | length 20.8
  Top Layer w0.3: U301.17@102.484,407.428 102.882,407.428 103.505,408.051 103.505,408.686 v1(103.632,408.813)
  Bottom Layer w0.35: H400.5@92.202,416.306 93.726,416.306 94.615,417.195 96.901,417.195 99.314,414.782 102.743,414.782 104.14,413.385 104.14,409.321 v1(103.632,408.813)
NetIC400_1: IC400.1 R415.1 U404.6 | length 54.9
  Top Layer w0.5: U404.6@138.68,446.853 138.68,448.56 138.91,448.79 R415.1@138.91,449.768 138.91,457.045 140.081,458.216 154.559,458.216 161.671,465.328 v1(161.671,465.709) v1@161.417,465.709 ; v1(171.831,465.963) 173.736,465.963 174.244,465.455 IC400.1@174.244,460.514
  Bottom Layer w0.5: v1(161.671,465.709) 168.783,465.709 169.037,465.963 v1(171.831,465.963)